# Altium PCB KORICHE_N4.PCBDOC
Units mm, origin at the board's own origin, x right, y up, seen from the top; angles counter-clockwise.
Board outline 62.36 x 79.25 mm, 2 copper layers (TopLayer, BottomLayer); 23 components, 20 nets, 102 pads, 10 vias.
Unrouted connection lines stored in the file: 1.
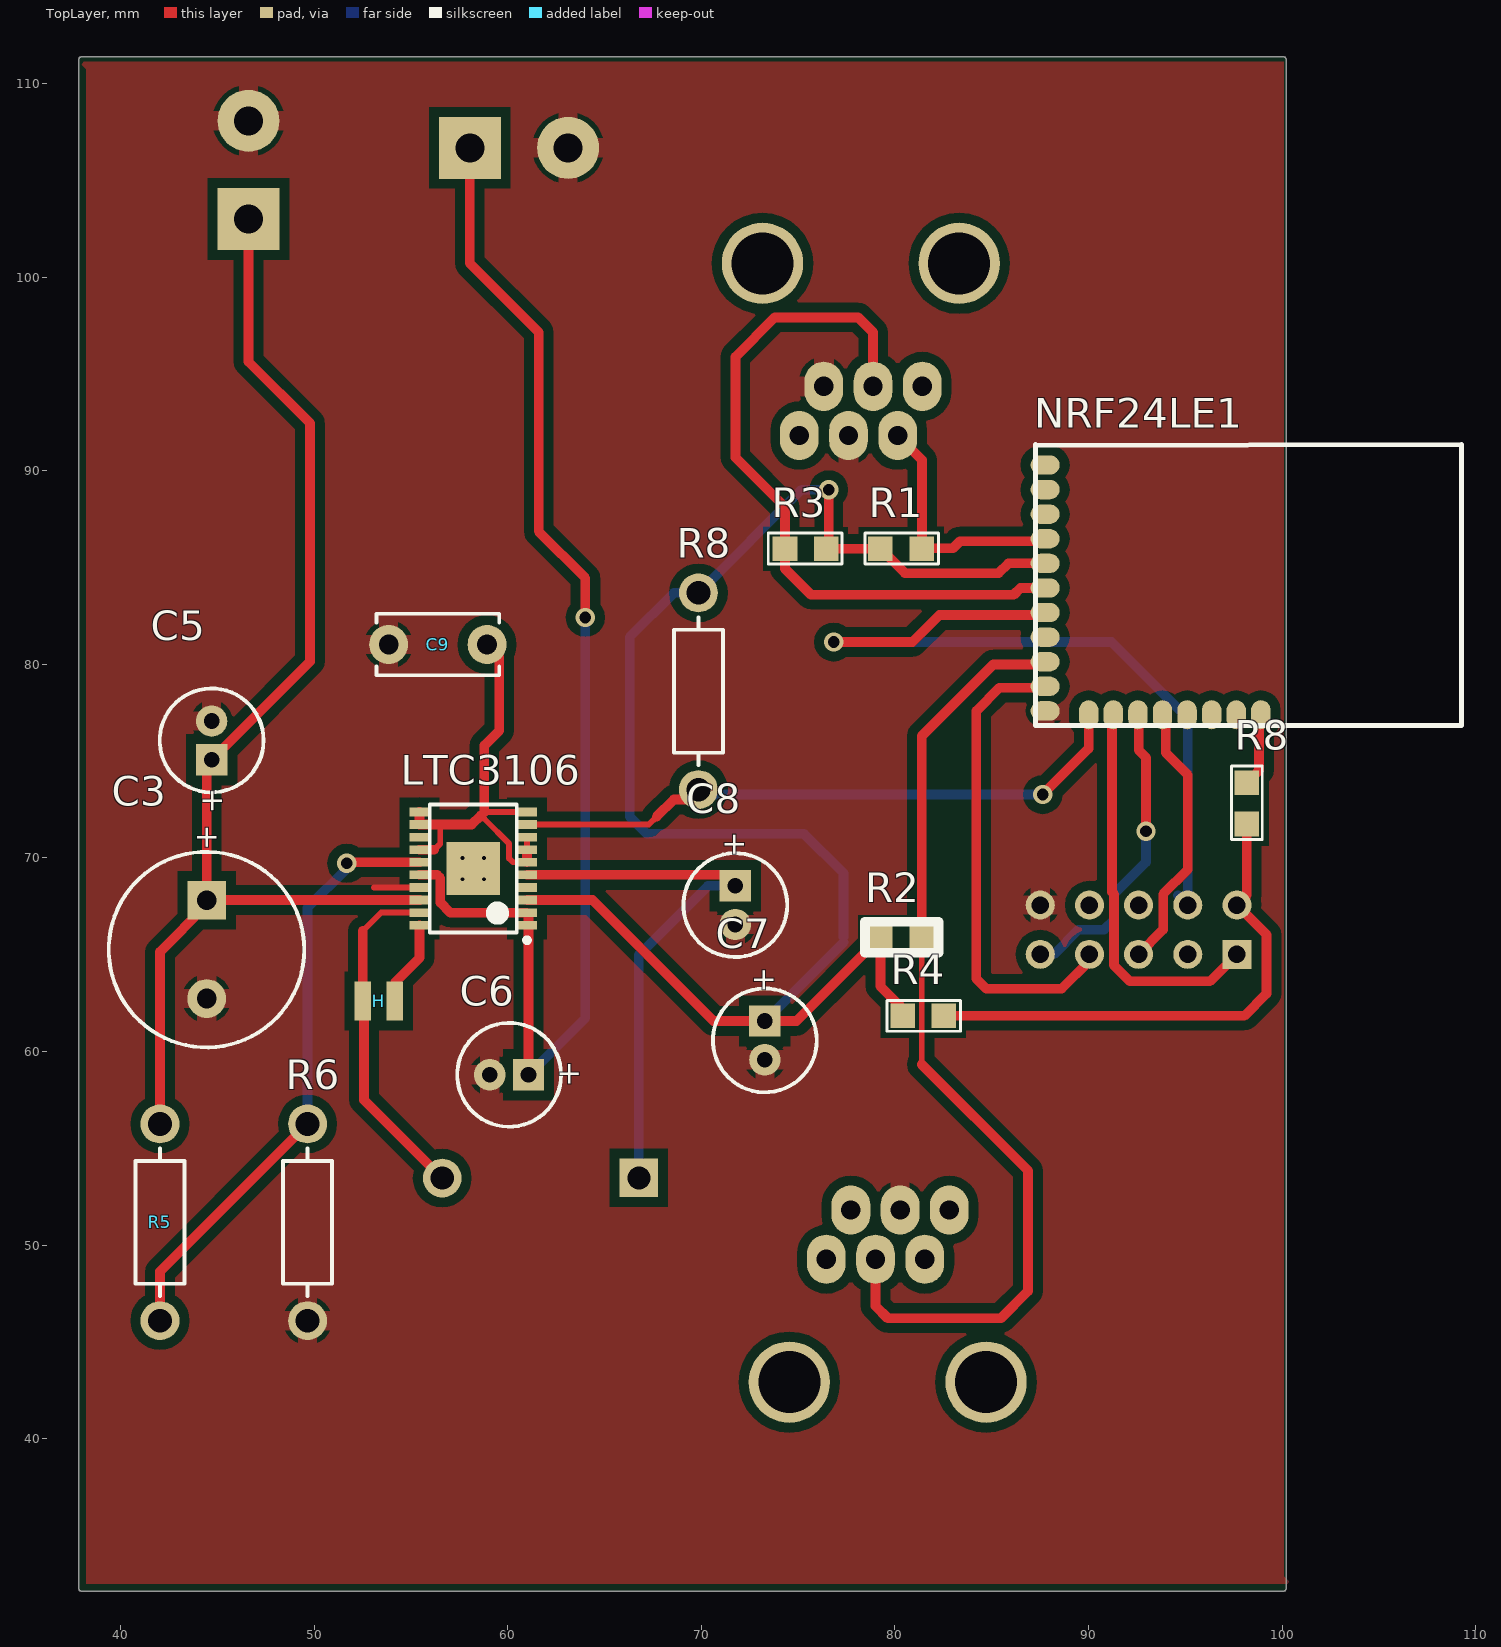
[diagram p0: TopLayer view]
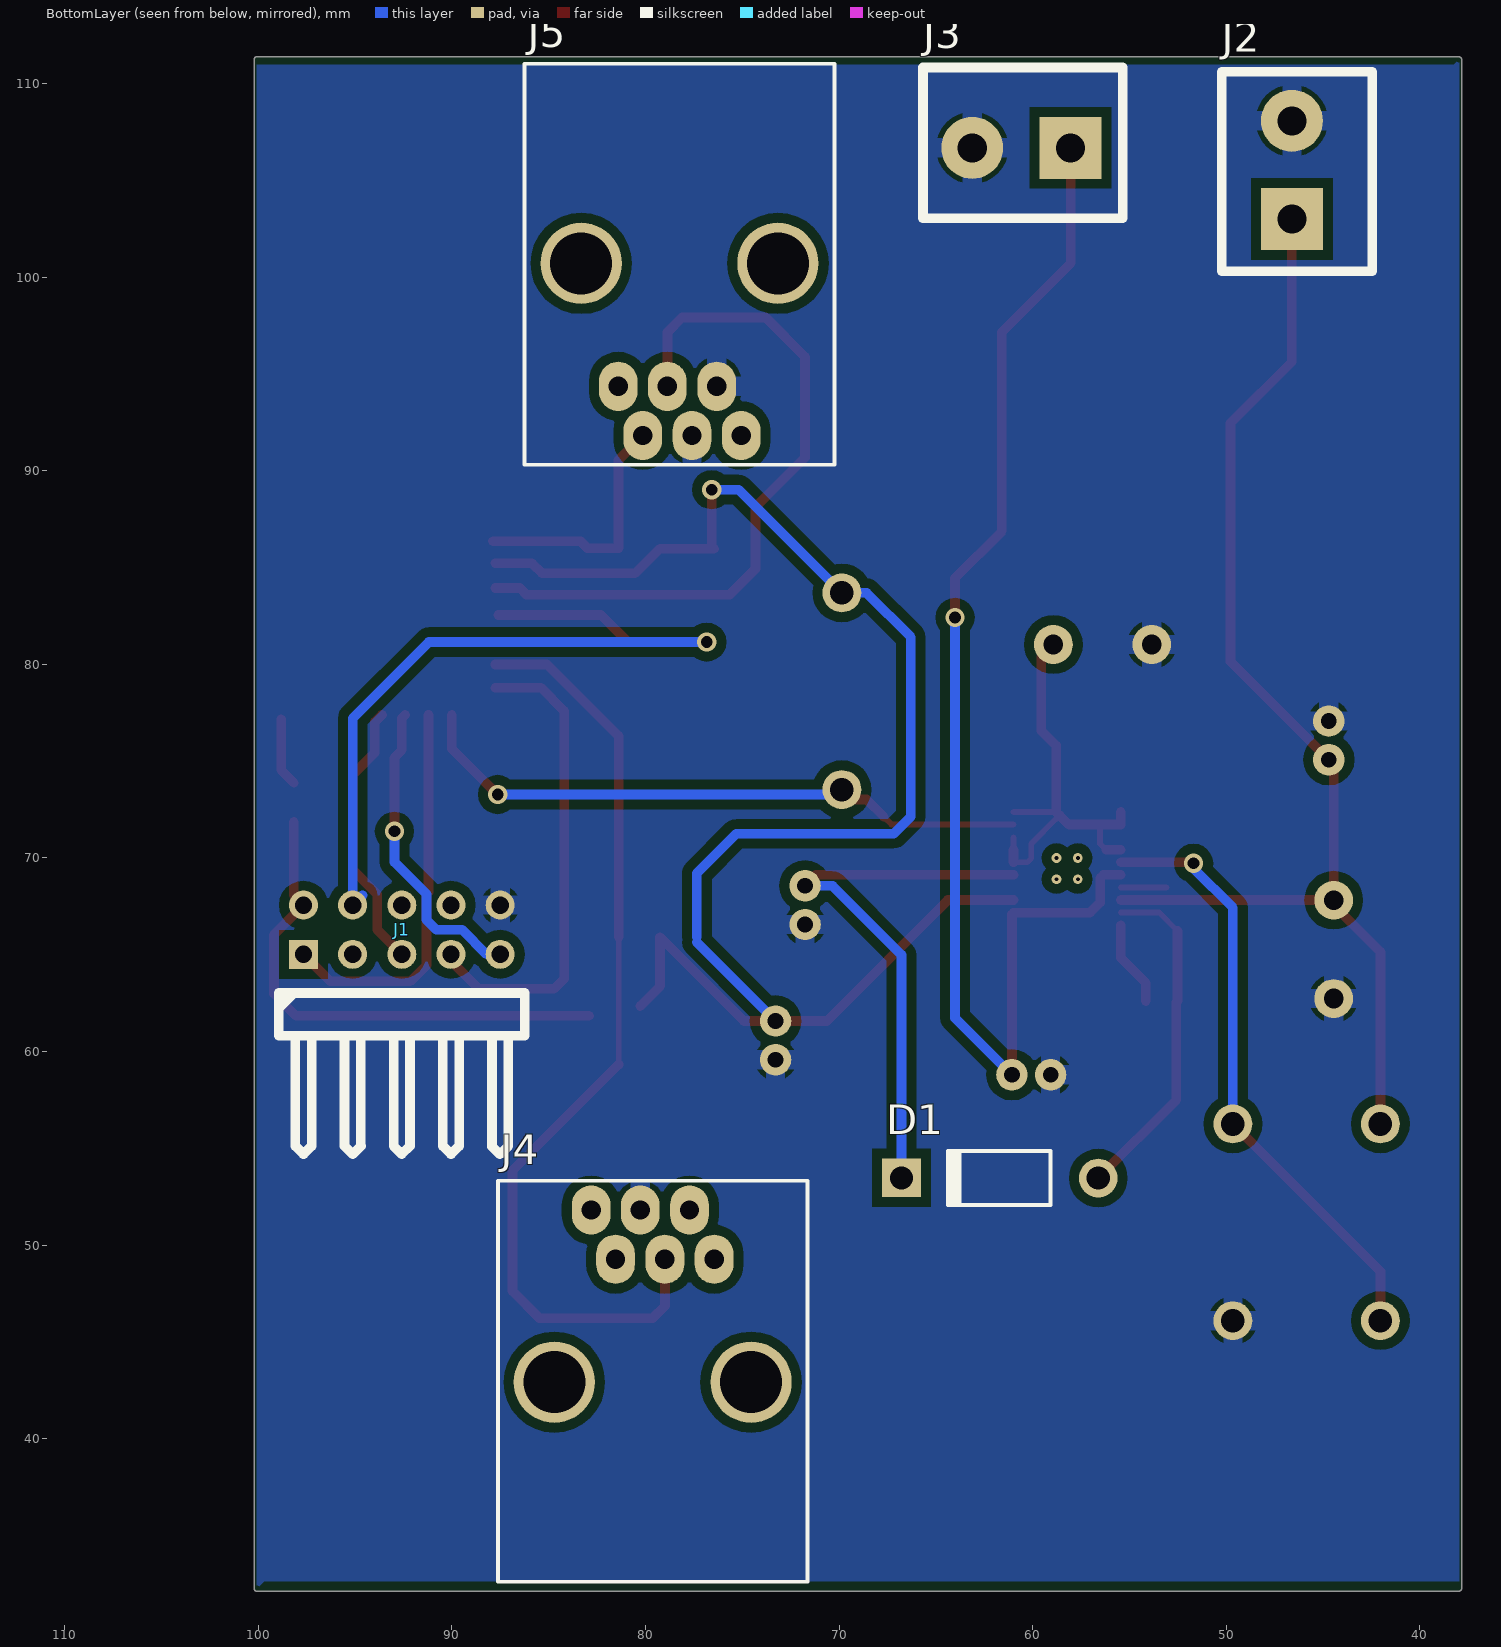
[diagram p1: BottomLayer view, seen from below]
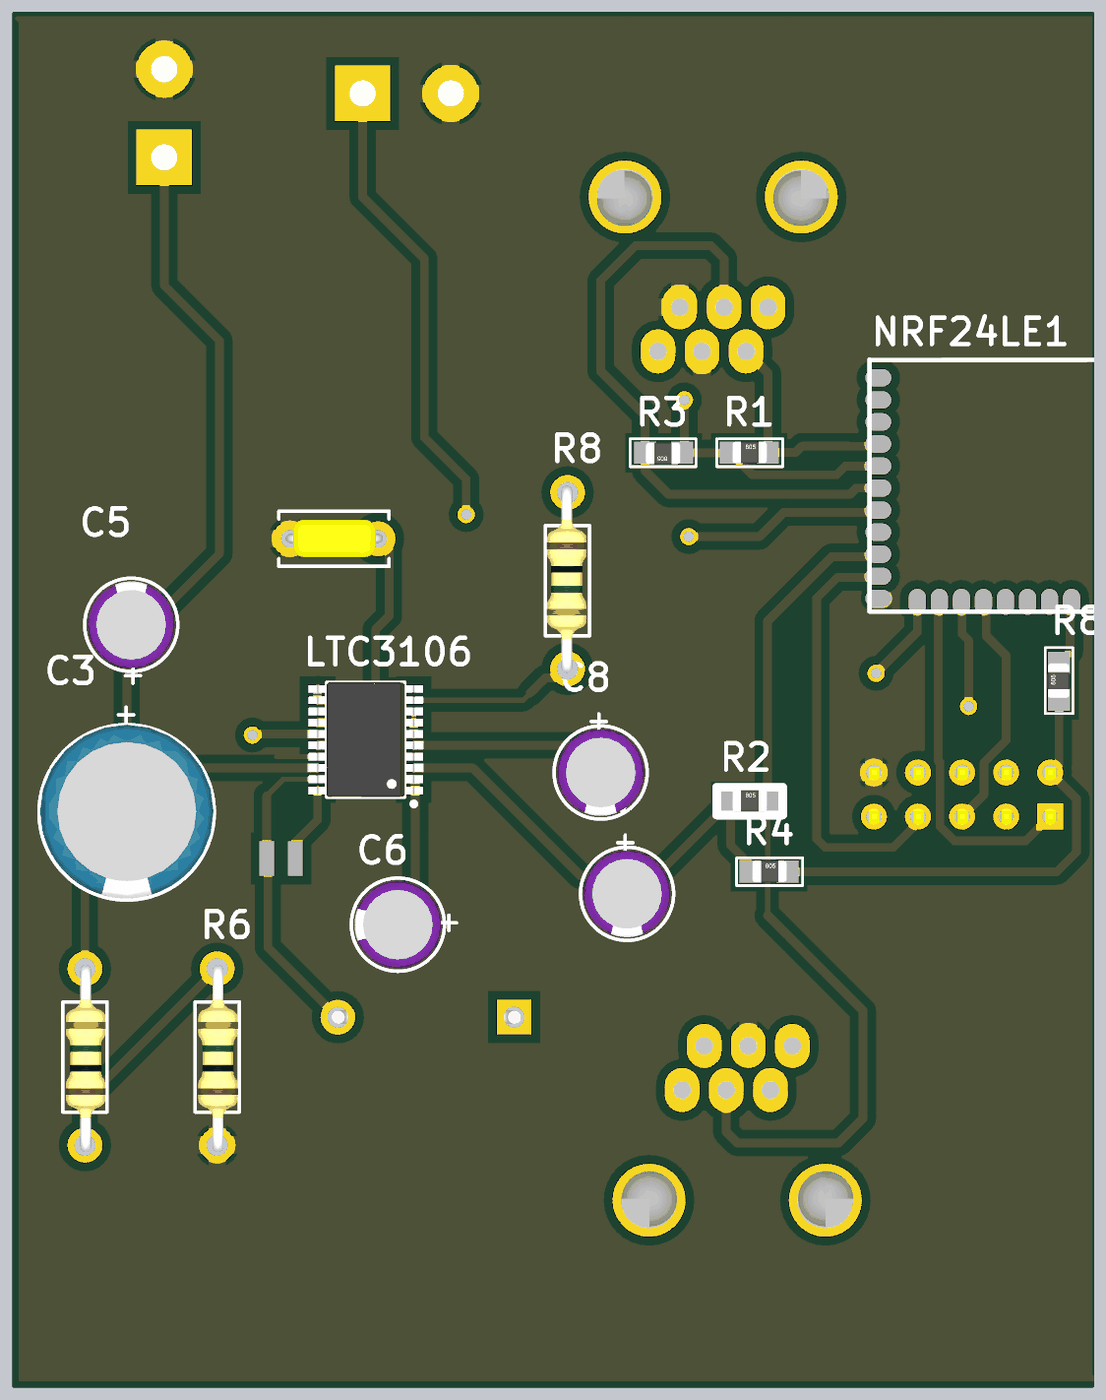
[diagram p2: 3D render of the assembled board from above, using the file's embedded part models]
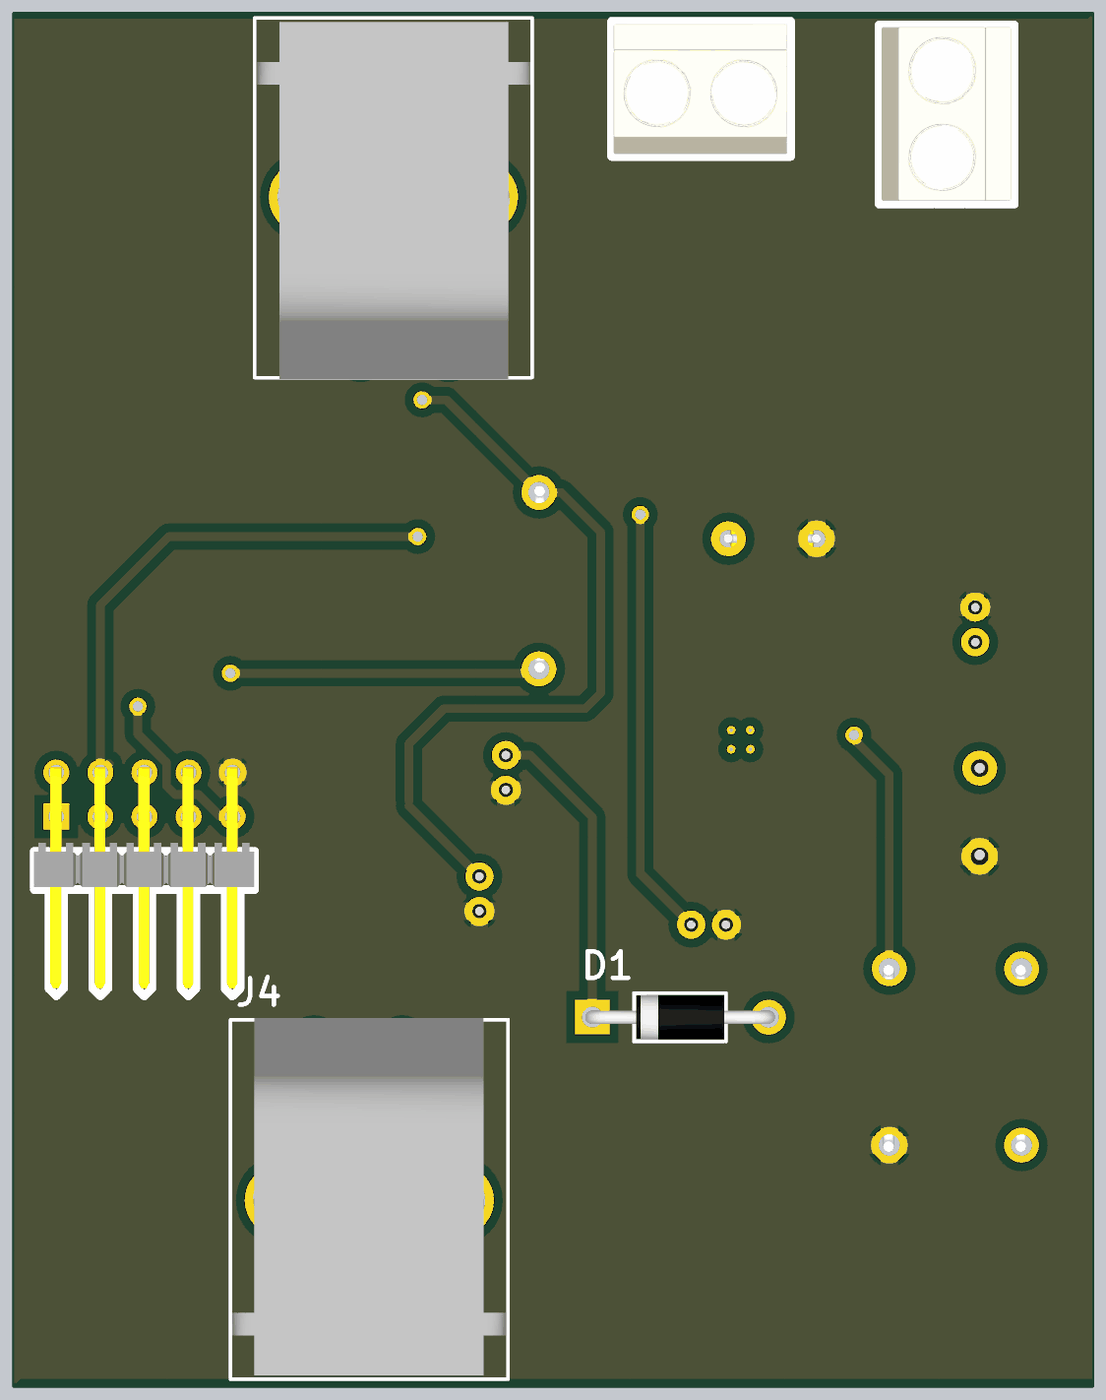
[diagram p3: 3D render of the assembled board from below, using the file's embedded part models]

## Layer stack, top to bottom
TopSolder: solder mask 0.0102, Solder Resist, Dk 3.5
TopLayer: signal copper 0.0356
Dielectric1: core 0.32, FR-4, Dk 4.8
BottomLayer: signal copper 0.0356
BottomSolder: solder mask 0.0102, Solder Resist, Dk 3.5

## Board outline
37.973,32.131 cw(c37.973,32.258) 37.846,32.258 37.846,111.252 cw(c37.973,111.252) 37.973,111.379 100.076,111.379 cw(c100.076,111.252) 100.203,111.252 100.203,32.258 cw(c100.076,32.258) 100.076,32.131

## Design rules (kind name [scope] priority, off if disabled: settings)
Clearance Clearance_14 [InNamedPolygon('GND_L01_P014')] p1: gap=0.5 ignorepadtopadclearanceinfootprint=FALSE
Clearance Clearance_13 [InNamedPolygon('GND_L02_P016')] p2: gap=0.5 ignorepadtopadclearanceinfootprint=FALSE
Clearance Clearance_12 [InNamedPolygon('GND_L02_P016')] p3: gap=0.254 ignorepadtopadclearanceinfootprint=FALSE except(0: Arc-Hole Track-Hole SMDPad-Hole THPad-Hole Via-Hole Fill-Hole Poly-Hole Region-Hole Text-Hole)
Clearance Clearance_11 [InNamedPolygon('GND_L02_P012')] p4: gap=0.5 ignorepadtopadclearanceinfootprint=FALSE except(0: Arc-Hole Track-Hole SMDPad-Hole THPad-Hole Via-Hole Fill-Hole Poly-Hole Region-Hole Text-Hole)
Clearance Clearance_10 [InNamedPolygon('GND_L01_P010')] p5: gap=0.5 ignorepadtopadclearanceinfootprint=FALSE except(0: Arc-Hole Track-Hole SMDPad-Hole THPad-Hole Via-Hole Fill-Hole Poly-Hole Region-Hole Text-Hole)
Clearance Clearance_9 [InNamedPolygon('top-No Net')] p6: gap=0.5 ignorepadtopadclearanceinfootprint=FALSE except(0: Arc-Hole Track-Hole SMDPad-Hole THPad-Hole Via-Hole Fill-Hole Poly-Hole Region-Hole Text-Hole)
Clearance Clearance_8 [InNamedPolygon('bot-No Net')] p7: gap=0.5 ignorepadtopadclearanceinfootprint=FALSE except(0: Arc-Hole Track-Hole SMDPad-Hole THPad-Hole Via-Hole Fill-Hole Poly-Hole Region-Hole Text-Hole)
Clearance Clearance_7 [InNamedPolygon('GND_L02_P036')] p8: gap=0.254 ignorepadtopadclearanceinfootprint=FALSE except(0: Arc-Hole Track-Hole SMDPad-Hole THPad-Hole Via-Hole Fill-Hole Poly-Hole Region-Hole Text-Hole)
Clearance Clearance_6 [InNamedPolygon('NONET_L01_P004')] p9: gap=0.5 ignorepadtopadclearanceinfootprint=FALSE except(0: Arc-Hole Track-Hole SMDPad-Hole THPad-Hole Via-Hole Fill-Hole Poly-Hole Region-Hole Text-Hole)
Clearance Clearance_5 [InNamedPolygon('NONET_L01_P004')] p10: gap=0.5 ignorepadtopadclearanceinfootprint=FALSE except(0: Arc-Hole Track-Hole SMDPad-Hole THPad-Hole Via-Hole Fill-Hole Poly-Hole Region-Hole Text-Hole)
Clearance Clearance_4 [InNamedPolygon('NONET_L01_P004')] p11: gap=0.5 ignorepadtopadclearanceinfootprint=FALSE except(0: Arc-Hole Track-Hole SMDPad-Hole THPad-Hole Via-Hole Fill-Hole Poly-Hole Region-Hole Text-Hole)
Clearance Clearance_3 [InNamedPolygon('NONET_L01_P004')] p12: gap=0.5 ignorepadtopadclearanceinfootprint=FALSE except(0: Arc-Hole Track-Hole SMDPad-Hole THPad-Hole Via-Hole Fill-Hole Poly-Hole Region-Hole Text-Hole)
Clearance Clearance_2 [InNamedPolygon('NONET_L01_P004')] p13: gap=0.5 ignorepadtopadclearanceinfootprint=FALSE except(0: Arc-Hole Track-Hole SMDPad-Hole THPad-Hole Via-Hole Fill-Hole Poly-Hole Region-Hole Text-Hole)
Clearance Clearance_1 [InNamedPolygon('NONET_L02_P005') Or  InNamedPolygon('NONET_L01_P004')] p14: gap=0.5 ignorepadtopadclearanceinfootprint=FALSE except(0: Arc-Hole Track-Hole SMDPad-Hole THPad-Hole Via-Hole Fill-Hole Poly-Hole Region-Hole Text-Hole)
Clearance PowerPlaneClearance [InNamedPolygon('NONET_L02_P005') Or  InNamedPolygon('NONET_L01_P004')] p15 off: gap=1.016 ignorepadtopadclearanceinfootprint=FALSE except(0: Arc-Hole Track-Hole SMDPad-Hole THPad-Hole Via-Hole Fill-Hole Poly-Hole Region-Hole Text-Hole)
Clearance [All] p16: gap=0.3 ignorepadtopadclearanceinfootprint=FALSE except(0: Arc-Hole Track-Hole SMDPad-Hole THPad-Hole Via-Hole Fill-Hole Poly-Hole Region-Hole Text-Hole)
FabricationTestPointUsage TestPointUsage [All] p1: valid=0 allowmultiple=FALSE
FabricationTestpoint Testpoint [All] p1: side=3 testpointundercomponent=TRUE minsize=1.016 maxsize=2.54 preferedsize=1.524 minholesize=0.508 maxholesize=1.016 preferedholesize=0.813 testpointgrid=0.025 allowsidetop=TRUE allowsidebottom=TRUE usegrid=TRUE gridtolerance=0
Height [All] p1: minheight=0 maxheight=50.8 prefheight=12.7
HoleSize [All] p1: absolutevalues=TRUE maxlimit=7.62 minlimit=0.025 maxpercent=80.000 minpercent=20.000
PlaneClearance [All] p1: clearance=1.016
PlaneConnect [All] p1: planeconnectstyle=Relief reliefexpansion=0.5 reliefentries=4 reliefconductorwidth=1.016 reliefairgap=0.5
PolygonConnect [All] p1: connectstyle=Relief reliefconductorwidth=1.016 reliefentries=4 polygonreliefangle="90 Angle" airgapwidth=0.254
RoutingVias [All] p1: holewidth=0.6 width=1.524 viastyle="Through Hole" minholewidth=0.6 minwidth=1.524 maxholewidth=0.6 maxwidth=1.524
SilkToSolderMaskClearance SilkscreenOverComponentPads [IsPad] p1: minsilkscreentomaskgap=0.254 clearancetoexposedcopper=TRUE
SolderMaskExpansion [All] p1: expansion=0.05
Width [All] p1: maxlimit=3 minlimit=0.3 preferedwidth=0.5 minimp=50.000000 maximp=50.000000 favimp=50.000000
23 further rules are at their usual default settings.

## Components (designator, comment, footprint, x,y, rotation, side; value= is the part's Value field where it differs from the comment)
C3 "CONDENSATEUR_POL_ELECTROLY_RAD_5.08/10.16" CONDENSATEUR_POLARISE_ELECTROLYTIQUE_RADIAL_5.08/10.16 44.45,67.818 r270 top value=470µF/63V
C5 "CONDENSATEUR_POL_ELECTROLY_RAD_2.0/5.08" CONDENSATEUR_POLARISE_ELECTROLYTIQUE_RADIAL_2.0/5.08 44.704,76.073 r90 top value=10µF/63V
C6 "CONDENSATEUR_POL_ELECTROLY_RAD_2.0/5.08" CONDENSATEUR_POLARISE_ELECTROLYTIQUE_RADIAL_2.0/5.08 60.071,58.801 r180 top value=47µF/63V
C7 "CONDENSATEUR_POL_ELECTROLY_RAD_2.0/5.08" CONDENSATEUR_POLARISE_ELECTROLYTIQUE_RADIAL_2.0/5.08 73.279,60.579 r270 top value=47µF/63V
C8 "CONDENSATEUR_POL_ELECTROLY_RAD_2.0/5.08" CONDENSATEUR_POLARISE_ELECTROLYTIQUE_RADIAL_2.0/5.08 71.755,67.564 r270 top value=2.2µF/63V
C9 "CONDENSATEUR_CER_RAD_5.08" CONDENSATEUR_CERAMIQUE_RADIAL_5.08 58.928,81.026 r180 top value=100nF
D1 "DIODE_SCHOTTKY_DO41 : 1N5817" DIODE_DO41 61.722,53.467 r0 bottom
H "Bobine_22nH" SELF 53.34,62.611 r180 top
J1 "BARRETTE_5 CONTACTS_2 RANGEES_MALE_COUDEE" BARRETTE_5X2_M_C 97.663,65.024 r180 bottom
J2 "BORNIER2 DROIT A VIS" BORNIER2_A_VIS 46.609,102.997 r90 bottom
J3 "BORNIER2 DROIT A VIS" BORNIER2_A_VIS 58.039,106.68 r0 bottom
J4 "RJ12_6/6" RJ12_6/6 77.724,51.816 r270 bottom
J5 "RJ12_6/6" RJ12_6/6 80.137,91.821 r90 bottom
LTC3106 "LTC3106_Regulateur" ltc3106 47.117,81.153 r180 top
NRF24LE1 "NRF24LE1_32Pin" "NRF24LE1 SMD" 87.757,77.597 r90 top
R1 "RESISTANCE_CMS_0805" RESISTANCE_CMS_0805 79.248,85.979 r0 top value=1K
R2 "RESISTANCE_CMS_0805" RESISTANCE_CMS_0805 79.248,65.913 r0 top value=1K
R3 "RESISTANCE_CMS_0805" RESISTANCE_CMS_0805 76.454,85.979 r180 top value=1K
R4 "RESISTANCE_CMS_0805" RESISTANCE_CMS_0805 80.391,61.849 r0 top value=0OHM
R5 "RESISTANCE_AXIALE_1/4W" RESISTANCE_1/4W 42.037,46.101 r90 top value=1K
R6 "RESISTANCE_AXIALE_1/4W" RESISTANCE_1/4W 49.657,46.101 r90 top value=1K
R8 "RESISTANCE_AXIALE_1/4W" RESISTANCE_1/4W 69.85,83.693 r270 top value=1K
R8 "RESISTANCE_CMS_0805" RESISTANCE_CMS_0805 98.171,71.755 r90 top value=1K

## Footprints (in the part's own frame and the unit in brackets; to place one, negate y for a bottom-side part, rotate by r counter-clockwise, add the part's x,y. Pads: shape width x height; smd on the part's side, far side on the other; paste and mask are expansions set on the pad)
BARRETTE_5X2_M_C [mm] "BARRETTE 5 CONTACTS ; 2 RANGEES ; COUDEE ; MALE ; ESPACEMENT BROCHES = 2.54 mm"
  rect 1.5x1.5 hole 0.9: 1(0,0)
  round 1.5 hole 0.9: 2(0,2.54) 3(2.54,0) 4(2.54,2.54) 5(5.08,0) 6(5.08,2.54) 7(7.62,0) 8(7.62,2.54) 9(10.16,0) 10(10.16,2.54)
  silkscreen extent -1.27,-10.34 11.43,-2, body extent -1.3,-9.9 11.4,2.86, height 5.64
BORNIER2_A_VIS [mm] "BORNIER 2 PLOTS A VIS ; VERTICAL ; ESPACEMENT BROCHES = 5.08mm"
  rect 3.2x3.2 hole 1.5: 1(0,0)
  round 3.2 hole 1.5: 2(5.08,0)
  silkscreen extent -2.69,-4.15 7.62,3.63, body extent -2.5,-4 7.5,3.5, height 10
CONDENSATEUR_CERAMIQUE_RADIAL_5.08 [mil] "CONDENSATEUR TRAVERSANT CERAMIQUE RADIAL ; DIMENSIONS : 3.17mm x 5.08mm"
  round 79 hole 40: 1(0,0) 2(200,0)
  silkscreen extent -25,-62 225,63, body extent -11,-43 209,42, height 148
CONDENSATEUR_POLARISE_ELECTROLYTIQUE_RADIAL_2.0/5.08 [mil] "CONDENSATEUR POLARISE ELECTROLYTIQUE RADIAL ; DIAMETRE : 5.08mm ; ESPACEMENT BROCHES : 2mm"
  rect 64x64 / inner round 64 / far side round 64 hole 32: 1(-39.37,0)
  round 64 hole 32: 2(39.37,0)
  silkscreen extent -106,-106 106,105, body extent -98,-98 98,98, height 433
CONDENSATEUR_POLARISE_ELECTROLYTIQUE_RADIAL_5.08/10.16 [mil] "CONDENSATEUR POLARISE ELECTROLYTIQUE RADIAL ; DIAMETRE : 10.16mm ; ESPACEMENT BROCHES : 5.08mm"
  rect 79x79 / inner round 79 / far side round 79 hole 40: 1(0,0)
  round 79 hole 40: 2(200,0)
  silkscreen extent -98,-199 299,198, body extent -98,-197 295,197, height 630
DIODE_DO41 [mm] "DIODE DO41 ; DIMENSIONS : 5.2mm x 2.7mm ; PERCAGE : 0.8mm"
  round 2 hole 1.2: 1(-5.11,0)
  rect 2x2 hole 1.2: 2(5.05,-0.01)
  silkscreen extent -2.65,-1.4 2.75,1.4, body extent -5.47,-1.29 5.45,1.28, height 2.55
ltc3106 [mm] "TSOP, 20-Leads, Body 6,60x4,50mm, Pitch 0,65mm, Thermal Pad 2,74x2,74mm, IPC Medium Density"
  rect 1.05x0.45 smd: 1(-13.875,14.625) 2(-13.875,13.975) 3(-13.875,13.325) 4(-13.875,12.675) 5(-13.875,12.025) 6(-13.875,11.375) 7(-13.875,10.725) 8(-13.875,10.075) 9(-13.875,9.425) 10(-13.875,8.775) 11(-8.325,8.775) 12(-8.325,9.425) 13(-8.325,10.075) 14(-8.325,10.725) 15(-8.325,11.375) 16(-8.325,12.025) 17(-8.325,12.675) 18(-8.325,13.325) 19(-8.325,13.975) 20(-8.325,14.625)
  rect 2.74x2.74 smd: 21(-11.1,11.7)
  silkscreen extent -14,8.4 -8.85,15.52, body extent -14.4,8.4 -7.8,15, height 1.2
"NRF24LE1 SMD" [mm]
  oval 1.5x1 smd: 1(-0.2,-11.14) 2(-0.2,-9.87) 3(-0.2,-8.6) 4(-0.2,-7.33) 5(-0.2,-6.06) 6(-0.2,-4.79) 7(-0.2,-3.52) 8(-0.2,-2.25)
  oval 1x1.5 smd: 9(0,0) 10(1.27,0) 11(2.54,0) 12(3.81,0) 13(5.08,0) 14(6.35,0) 15(7.62,0) 16(8.89,0) 17(10.16,0) 18(11.43,0) 19(12.7,0)
  silkscreen extent -0.76,-21.51 13.75,0.51
RESISTANCE_1/4W [mil] "RESISTANCE 0.25W; DIAMETRE : 2.54mm ; LONGUEUR : 6.35mm ; PAS : 10.16mm"
  round 79 hole 48: 1(0,0) 2(400,0)
  silkscreen extent 50,-50 350,50, body extent -15,-47 409,44, height 116
RESISTANCE_CMS_0805 [mil] "RESISTANCE CMS 0805 ; DIMENSIONS : 2mm x 1.25mm"
  rect 50x50 smd: 1(0,0) 2(84,0)
  silkscreen extent -31,-31 118,31, body extent 4,-24 83,26, height 31
RJ12_6/6 [mm] "RJ12 ; 6P/6C ; BAS PROFIL ; COUDE ; ESPACEMENT BROCHES = 2.54 mm"
  oval 2.54x2 hole 1: 1(0,-5.08) 2(2.54,-3.82) 3(0,-2.54) 4(2.54,-1.27) 5(0,0) 6(2.54,1.27)
  round 4.2 hole 3.2: FIX1(8.89,3.18) FIX2(8.89,-6.98)
  silkscreen extent -1.51,-9.9 19.2,6.1, body extent -1.6,-9.8 18.97,5.95, height 16
SELF [mm] "Precision Wire Wound Inductor, 2-Leads, Body 2,50x2,00mm, IPC Medium Density"
  rect 0.85x2 smd: 1(-0.825,0) 2(0.825,0)
  body extent -1.25,-1 1.25,1, height 1.2

## Part data
C3: "CONDENSATEUR POLARISE ELECTROLYTIQUE RADIAL 5.08/10.16", Type=POL_RAD_5.08/10.16
C5 C6 C7 C8: "CONDENSATEUR POLARISE ELECTROLYTIQUE RADIAL 2.0/5.08", Type=POL_RAD_2.0/5.08
C9: "CONDENSATEUR TRAVERSANT CERAMIQUE RADIAL 5.08mm", Type=RADIAL_5.08
D1: "DIODE SCHOTTKY DO41 : 1N5817", Package=DO41, Type=1N5817
J1: "BARRETTE 5 CONTACTS 2 RANGEES MALE COUDEE", Type=M_C_5X2
J2 J3: library part "BORNIER2_DROIT_A VIS", "BORNIER 2 PLOTS DROIT A VIS 5.08mm", Type=BORNIER2_D
J4 J5: "EMBASE RJ12_6/6 COUDEE", Type=RJ12_6/6
LTC3106: library part "LTC31068FE PACKAGE", "LTC3106_Regulateur_MPC", Type=LTC3106
R1 R2 R3 R4 R8: "RESISTANCE CMS 0805", Type=CMS_0805
R5 R6 R8: "RESISTANCE TRAVERSANTE AXIALE 1/4W", Type=1/4W
H: Type=Bobine_10uH
NRF24LE1: =NRF24LE1_32Pin

## Via types
v1: diameter 1, hole 0.6, TopLayer to BottomLayer, 6 vias
v2: diameter 0.5, hole 0.2, TopLayer to BottomLayer, 4 vias

## Nets (pads, with @x,y where several pads share a name; then routed paths per layer and width w, separated by ;. In a path a pad name is that pad's centre, name@x,y a point inside that pad or via, vN(x,y) a via of type N, cw(c..) or ccw(c..) an arc to the next point about the centre after c; other vN are vias at no path point)
0OHM: J1.2 R4.2 R8.1@98.171,71.755 | length 26.5
  TopLayer w0.5: R4.2@82.906,61.849 98.044,61.849 99.187,62.992 99.187,66.04 J1.2 98.171,68.072 R8.1@98.171,71.855
1: C6.1 J3.1 LTC3106.1 LTC3106.2 LTC3106.16 | length 67
  TopLayer w0.5: LTC3106.16 56.348,69.128 56.515,68.961 56.515,67.691 57.028,67.178 LTC3106.2 LTC3106.2@60.992,67.099 ; J3.1 58.039,100.711 61.595,97.155 61.595,86.868 64.008,84.455 v1(64.008,82.423) ; C6.1 LTC3106.2@61.071,67.099
  BottomLayer w0.5: C6.1 64.008,61.738 v1(64.008,82.423)
aneo: J5.5 NRF24LE1.16 R1.2 | length 13
  TopLayer w0.5: 86.059,86.36 NRF24LE1.16@87.884,86.36
  TopLayer w0.508: J5.5 81.4,90.558 81.4,85.997 82.989,85.997 83.352,86.36 86.059,86.36
FCSN: J1.5 NRF24LE1.5 | length 14.1
  TopLayer w0.5: J1.5 93.853,66.294 93.853,68.132 95.123,69.402 95.123,74.295 93.98,75.438 93.98,77.024 NRF24LE1.5@93.607,77.397
FMISO: J1.9 NRF24LE1.6 | length 16.1
  TopLayer w0.5: NRF24LE1.6@92.407,77.397 92.583,77.221 92.583,75.565 92.964,75.184 v1(92.964,71.374)
  BottomLayer w0.5: J1.9 88.205,65.024 89.475,66.294 90.805,66.294 91.313,66.802 91.313,68.132 92.964,69.783 v1(92.964,71.374)
FMOSI: J1.1 NRF24LE1.7 | length 20.3
  TopLayer w0.5: NRF24LE1.7@91.207,77.397 91.207,68.238 91.313,68.132 91.313,64.456 92.142,63.627 96.266,63.627 J1.1
FSCK: J1.7 NRF24LE1.10 | length 24.9
  TopLayer w0.5: NRF24LE1.10@87.757,78.797 85.401,78.797 84.201,77.597 84.201,63.754 84.709,63.246 88.614,63.246 90.043,64.675 J1.7
GND: C3.2 C5.2 C6.2 C7.2 C8.2 C9.2 J1.10 J2.2 J3.2 J4.3 J5.2 J5.3 LTC3106.13 LTC3106.17 NRF24LE1.9 R6.1 | length 2.4
  TopLayer w0.3: 53.086,68.478 LTC3106.17
gyro: J5.4 NRF24LE1.14 R3.2 | length 37.2
  TopLayer w0.508: J5.4 78.867,97.155 78.105,97.917 73.787,97.917 71.755,95.885 71.755,90.692 74.32,88.127 R3.2 74.32,84.938 75.661,83.597 86.137,83.597 86.487,83.947 NRF24LE1.14
NetC8_1: C8.1 D1.2 LTC3106.5 | length 29
  TopLayer w0.5: LTC3106.5 71.191,69.128 C8.1
  BottomLayer w0.5: D1.2 66.772,64.994 70.342,68.564 C8.1
NetH_1: H.1 LTC3106.20 | length 4.4
  TopLayer w0.5: H.1 54.165,63.563 55.442,64.84 LTC3106.20
NetNRF24LE1_1: NRF24LE1.1 R8.2@98.171,73.889 | length 3.5
  TopLayer w0.5: R8.2@98.171,73.889 98.806,74.524 NRF24LE1.1@98.806,77.161
PGOOD: LTC3106.9 NRF24LE1.8 R8.2@69.85,73.533 | length 31.9
  TopLayer w0.3: LTC3106.9 67.283,71.728 67.691,72.136
  TopLayer w0.5: 67.691,72.136 68.58,73.025 R8.2@69.342,73.025 ; v1(87.63,73.279) 90.007,75.656 NRF24LE1.8
  BottomLayer w0.5: R8.2@69.85,73.533 70.104,73.279 v1(87.63,73.279)
pluv: J4.4 NRF24LE1.11 R2.2 | length 50
  TopLayer w0.3: 81.382,59.334 R2.2
  TopLayer w0.508: J4.4 78.994,46.863 79.629,46.228 85.471,46.228 86.868,47.625 86.868,53.848 81.382,59.334 ; R2.2 81.382,76.302 85.077,79.997 NRF24LE1.11@87.757,79.997
PROG: J1.4 NRF24LE1.13 | length 41.6
  TopLayer w0.5: v1(76.835,81.153) 80.905,81.153 82.299,82.547 NRF24LE1.13@87.607,82.547
  BottomLayer w0.5: v1(76.835,81.153) 91.186,81.153 95.123,77.216 J1.4 J1.4@94.615,68.072
RUN: LTC3106.15 R5.1 R6.2 | length 31.4
  TopLayer w0.5: R5.1 42.037,48.641 R6.2 ; v1(51.689,69.723) 51.744,69.778 LTC3106.15
  BottomLayer w0.5: R6.2 49.657,67.437 51.689,69.469 v1(51.689,69.723)
SHT: D1.1 H.2 LTC3106.19 | length 17.8
  TopLayer w0.3: 52.515,66.231 53.462,67.178 LTC3106.19
  TopLayer w0.5: 52.515,66.231 H.2 52.578,62.548 52.578,57.501 D1.1
Solar_Cell: C3.1 C5.1 J2.1 LTC3106.18 R5.2 | length 62
  TopLayer w0.5: R5.2 42.037,65.151 C3.1@44.45,67.564 ; C3.1 44.45,74.819 C5.1 49.784,80.153 49.784,92.456 46.609,95.631 J2.1 ; C3.1@44.46,67.828 LTC3106.18
VCC: C7.1 LTC3106.3 NRF24LE1.15 R1.1 R2.1 R3.1 R4.1 R8.1@69.85,83.693 | length 85.8
  TopLayer w0.5: LTC3106.3 64.379,67.828 70.628,61.579 C7.1 74.914,61.579 R2.1 79.248,63.373 R4.1@80.264,62.357 ; v1(76.581,89.027) 76.581,86.106 R3.1 R1.1 80.518,84.709 85.344,84.709 85.852,85.217 NRF24LE1.15
  BottomLayer w0.5: C7.1 77.343,65.643 ; v1(76.581,89.027) 75.184,89.027 69.85,83.693 68.58,83.693 66.294,81.407 66.294,72.136 67.183,71.247 75.311,71.247 77.343,69.215 77.343,65.913
VCCR: C9.1 LTC3106.6 LTC3106.7 LTC3106.8 LTC3106.10 LTC3106.11 LTC3106.12 LTC3106.14 | length 22.5
  TopLayer w0.3: 56.204,70.428 56.515,70.739 56.515,71.728 ; 58.801,72.009 60.071,70.739 60.071,69.977 60.27,69.778 LTC3106.6 ; 58.801,72.378 LTC3106.10 ; LTC3106.7 LTC3106.8@60.992,71.053
  TopLayer w0.5: LTC3106.14 56.204,70.428 ; LTC3106.11 LTC3106.12 56.515,71.728 58.139,71.728 58.61,72.2 ; 58.789,72.378 58.789,75.807 59.563,76.581 59.563,80.391 C9.1 ; LTC3106.6 LTC3106.7
pads on no net: J1.3 J1.6 J1.8 J4.1 J4.2 J4.5 J4.6 J4.FIX1 J4.FIX2 J5.1 J5.6 J5.FIX1 J5.FIX2 LTC3106.4 LTC3106.21 NRF24LE1.2 NRF24LE1.3 NRF24LE1.4 NRF24LE1.12 NRF24LE1.17 NRF24LE1.18 NRF24LE1.19
copper on no net:
  other v2: 57.667,68.903 58.767,68.903 57.667,70.003 58.767,70.003

## Polygon pours and split planes (outlines as drawn)
GND on TopLayer "GND_L01_P014" (solid, remove dead copper, pour order 14): 37.973,111.252 38.1,111.125 100.076,111.125 100.076,32.893 100.457,32.512 38.227,32.512 38.227,110.744 37.973,110.998
GND on BottomLayer "GND_L02_P016" (solid, remove dead copper, pour order 16): 37.973,111.252 38.256,110.969 100.076,110.969 100.076,32.258 99.695,32.639 37.973,32.639

## Other copper
TopLayer:

## Silkscreen, mask and mechanical layers (free items; w line width, h text height)
Mechanical15:
  lines w0.254: 37.973,32.258 100.076,32.258 100.076,111.252 37.973,111.252 37.973,32.258

## Text inside footprints (layer, text, board x,y; h text height)
C3: TopOverlay "+" at 43.96,71.728 h1.14 r270
C5: TopOverlay "+" at 45.254,72.293 h1.14 r90
C6: TopOverlay "+" at 63.851,59.351 h1.14 r180
C7: TopOverlay "+" at 72.729,64.359 h1.14 r270
C8: TopOverlay "+" at 71.205,71.344 h1.14 r270